# Altium PCB MainBoard.PcbDoc (part 1 of 2)
Units mil, origin at the board's own origin, x right, y up, seen from the top; angles counter-clockwise.
Board outline 6299.21 x 9187 mil, 4 copper layers (Component Side, Ground Plane, Power Plane, Solder Side), stack 33.234 mil thick; 72 components, 164 nets, 727 pads, 131 vias.
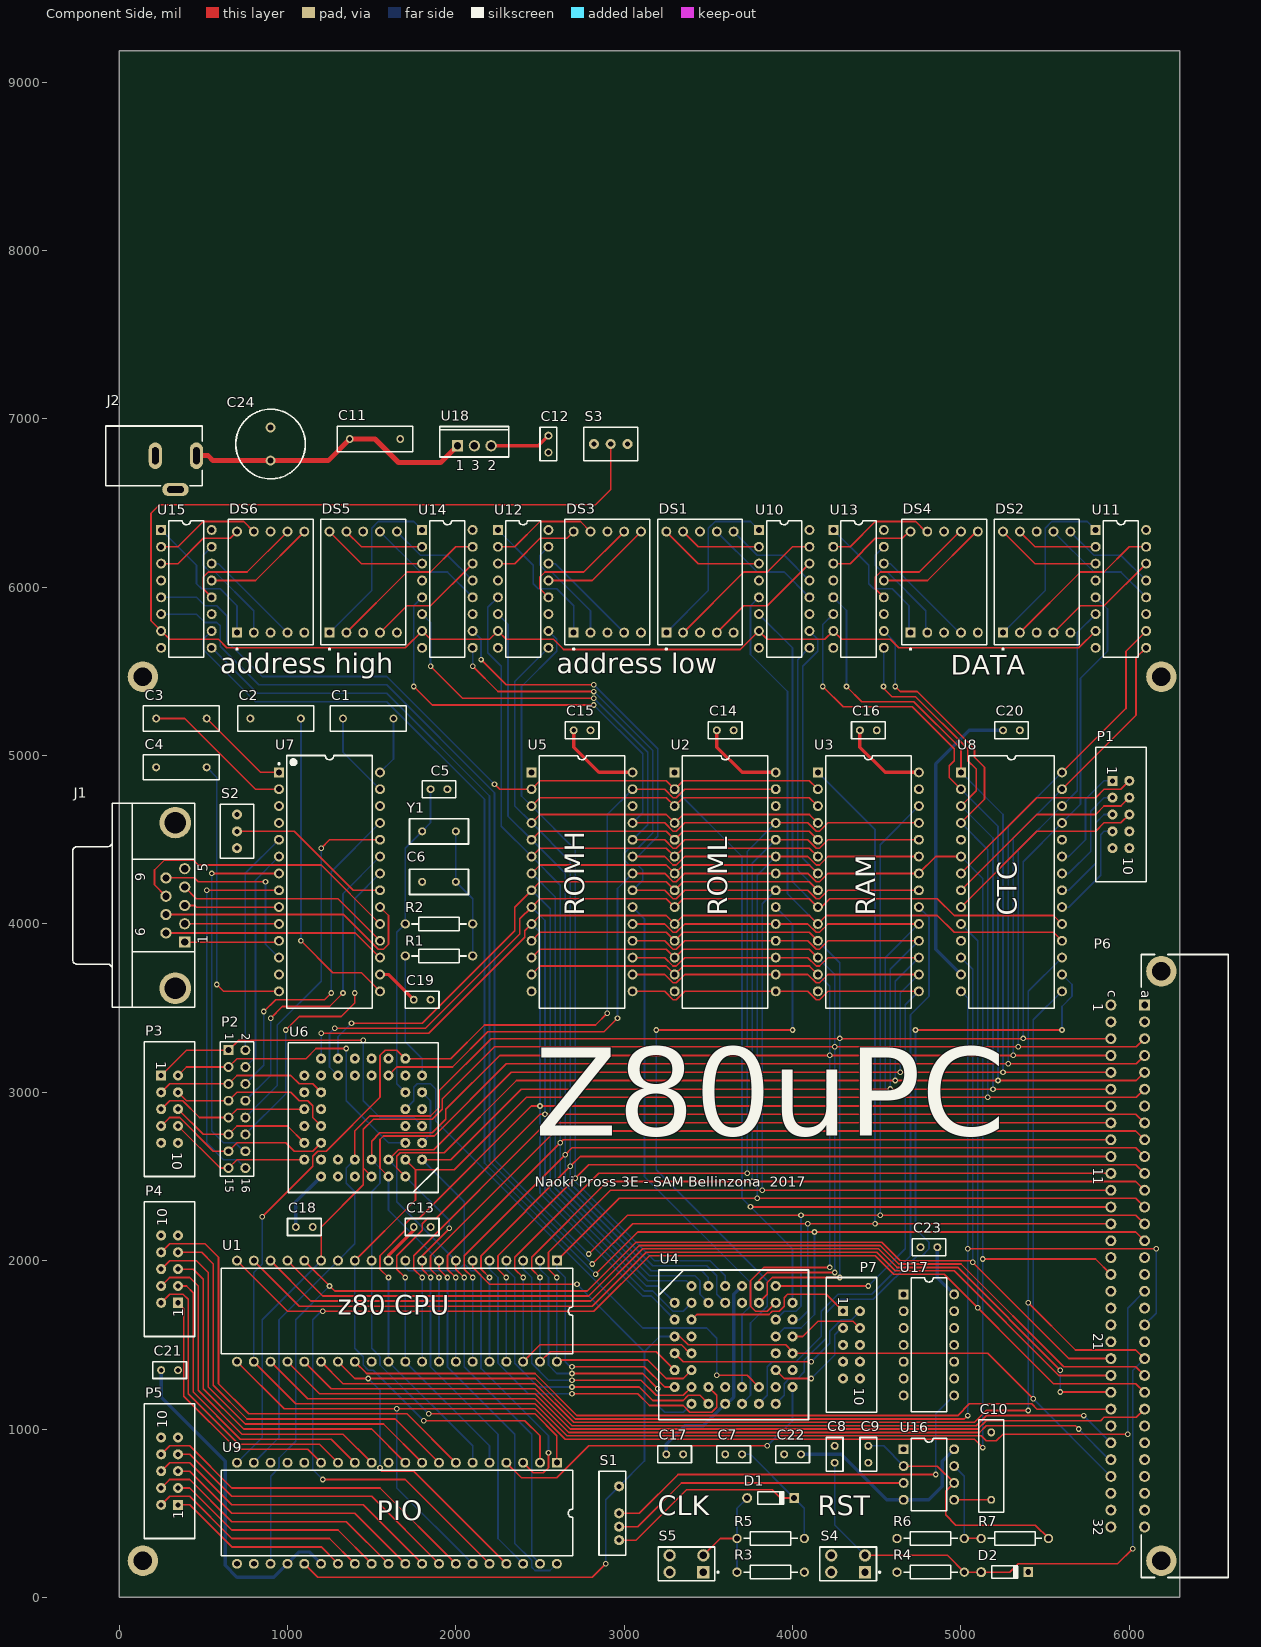
[diagram p0: Component Side view]
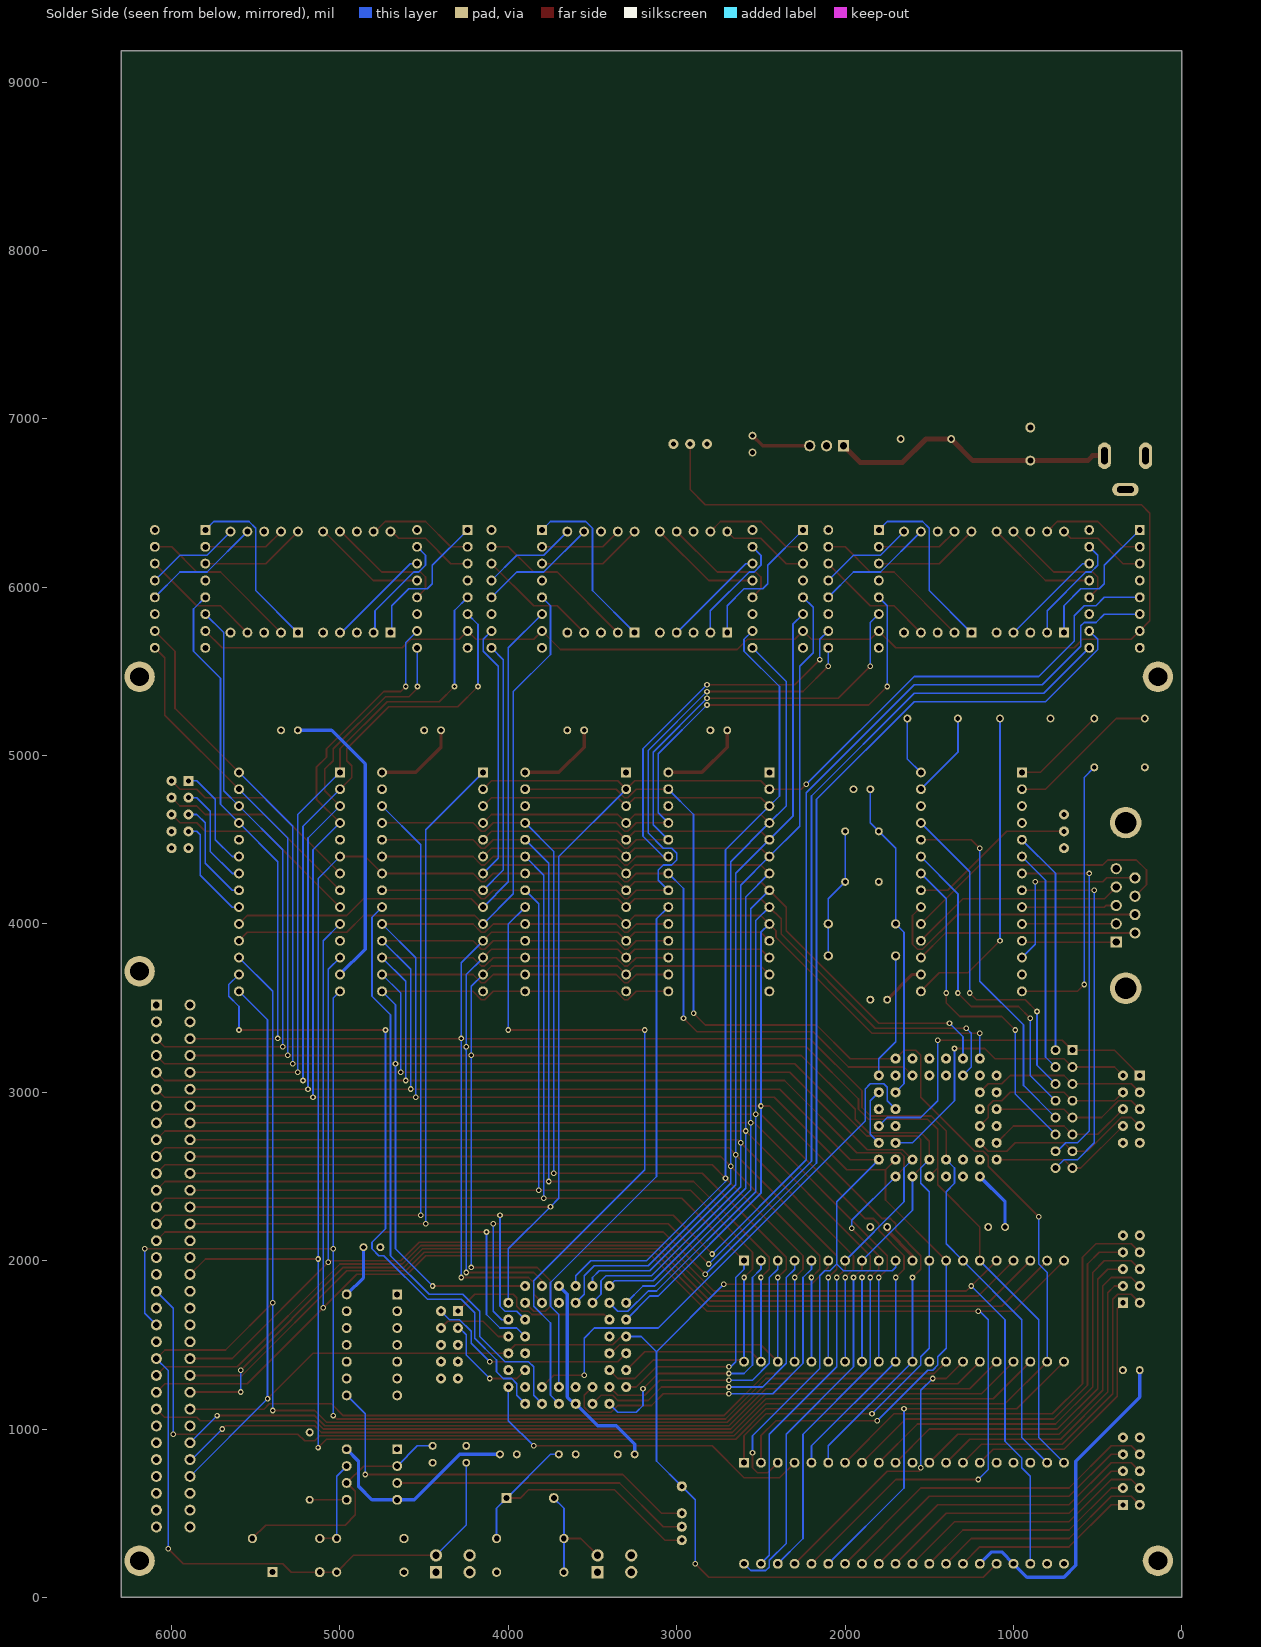
[diagram p1: Solder Side view, seen from below]
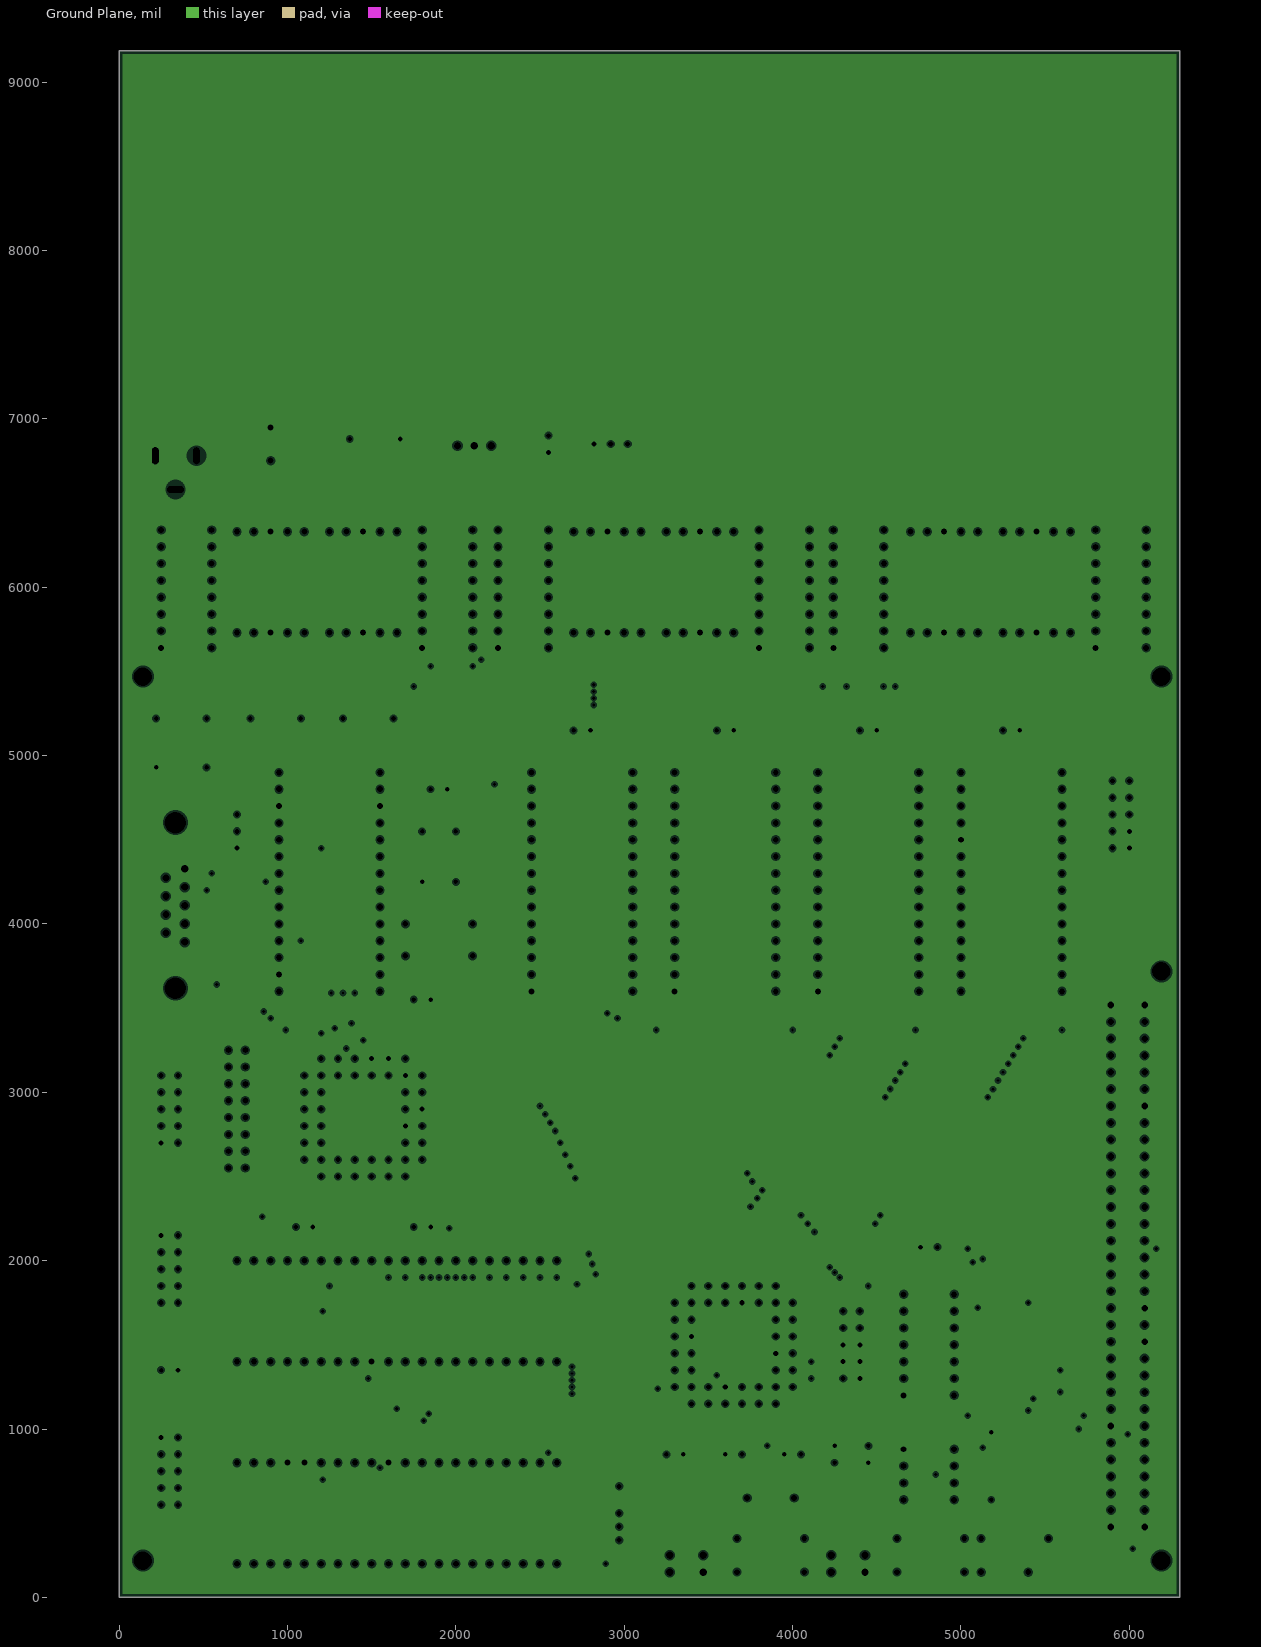
[diagram p2: Ground Plane, clearances drawn from the general rule]
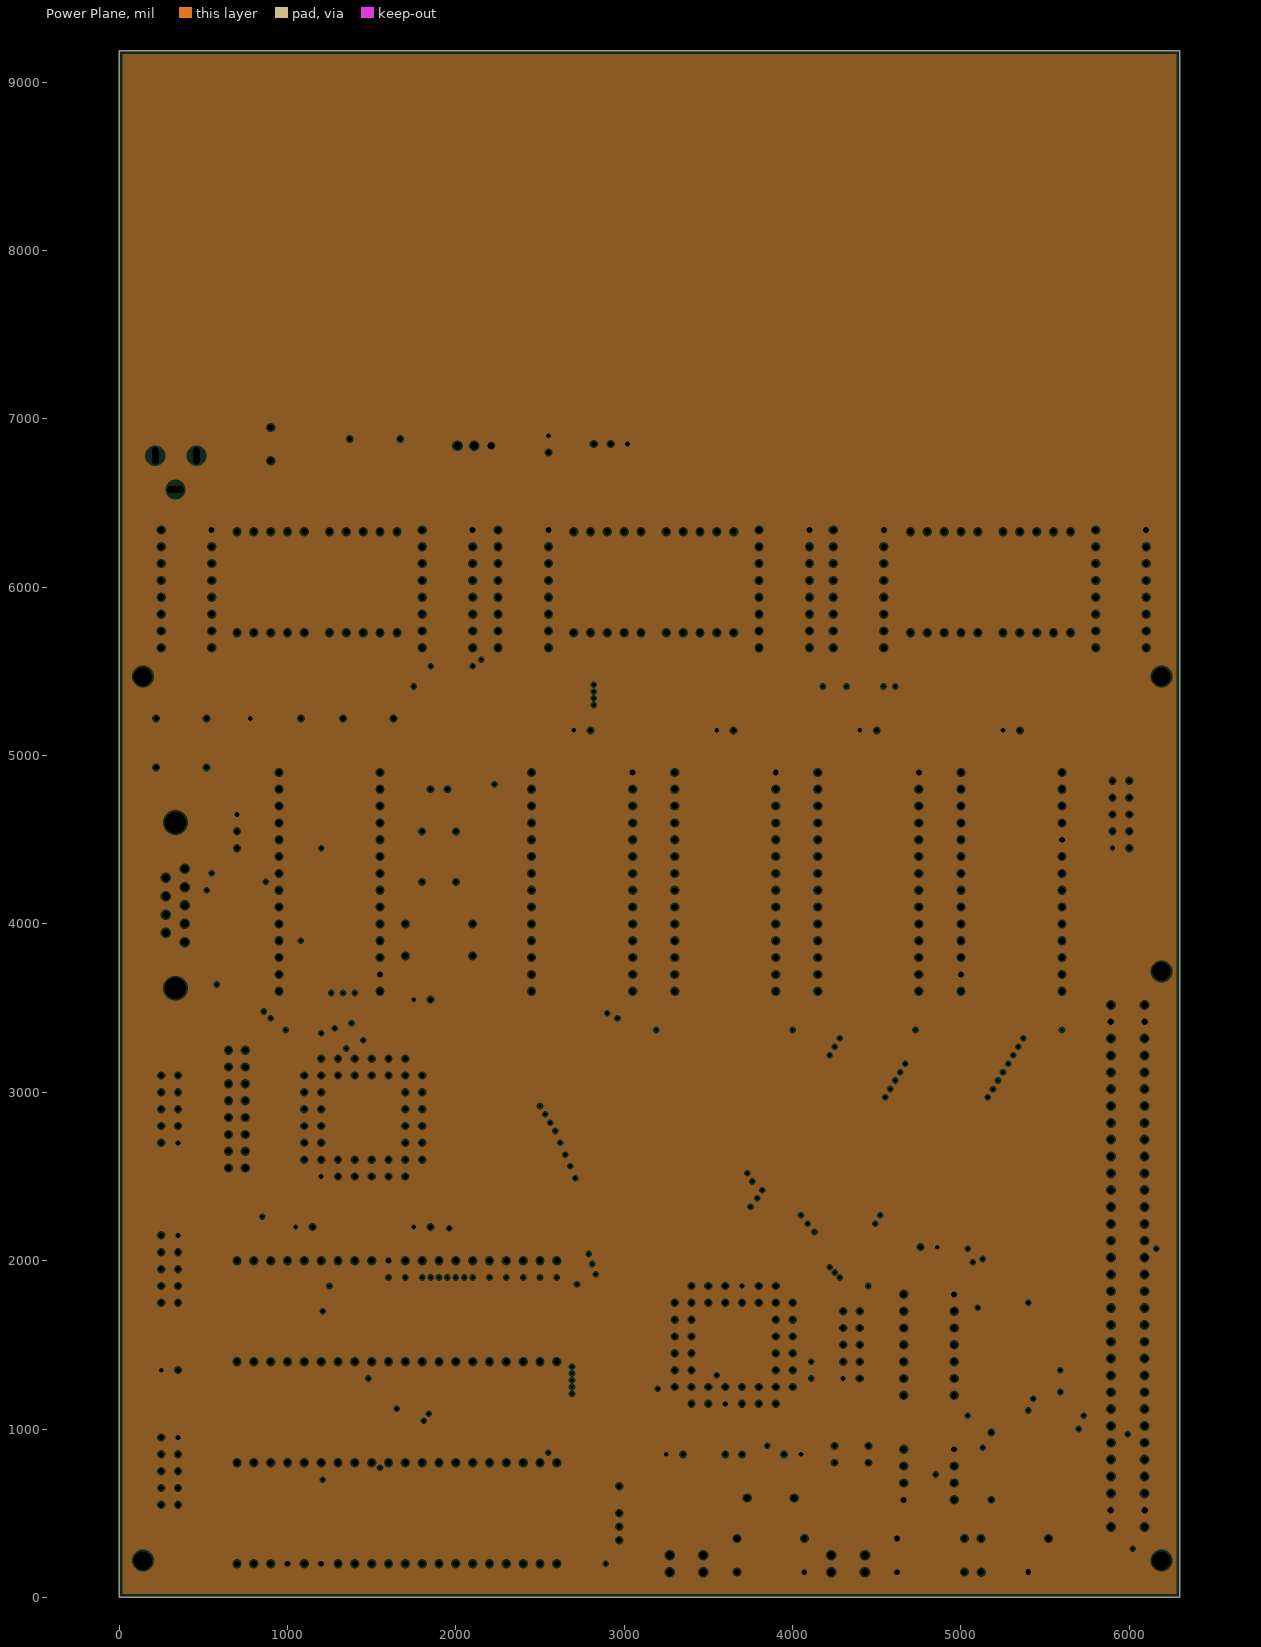
[diagram p3: Power Plane, clearances drawn from the general rule]

## Layer stack, top to bottom
Top Solder: solder mask 0.4, Solder Resist, Dk 3.5
Component Side: signal copper 1.4
Dielectric 1: core 12.6, FR-4, Dk 4.8
Ground Plane: plane copper 1.4169, net DB9-5
Dielectric 3: prepreg 5, Dk 4.2
Power Plane: plane copper 1.4169, net VCC
Dielectric 4: core 10, Dk 4.2
Solder Side: signal copper 1.4
Bottom Solder: solder mask 0.4, Solder Resist, Dk 3.5

## Board outline
0,0 0,9187 6299.21,9187 6299.21,0

## Design rules (kind name [scope] priority, off if disabled: settings)
BoardOutlineClearance [All] p1: gap=9.84 except(0: Arc-SplitContinuation Track-SplitContinuation SMDPad-SplitContinuation THPad-SplitContinuation Via-SplitContinuation Fill-SplitContinuation Poly-SplitContinuation Region-SplitContinuation Text-SplitContinuation)
Clearance Clearance-xPP-xTP-xTT [All] p1: gap=5.91
ComponentClearance [All] p1: gap=9.84 collisioncheckmode=3 verticalgap=9.84 showdistances=FALSE
DiffPairsRouting [All] p1: maxlimit=9.84 minlimit=9.84 mostfreqgap=9.84 toplayer_minwidth=15 toplayer_maxwidth=15 toplayer_prefwidth=15 bottomlayer_minwidth=15 bottomlayer_maxwidth=15 bottomlayer_prefwidth=15 maxuncoupledlength=492.13
Height [All] p1: minheight=0 maxheight=984.25 prefheight=492.13
HoleSize HoleSize-PTH [All] p1: absolutevalues=TRUE maxlimit=78.74 minlimit=9.84 maxpercent=80.000 minpercent=20.000
HoleToHoleClearance [All] p1: gap=13.78 allowstackedmicrovias=TRUE
MinimumAnnularRing "Minimum IAR  >0.45mm" [((ObjectKind = 'Pad') OR (ObjectKind = 'Via')) And (Layer = 'MultiLayer') And (HoleDiameter > AsMM(0.45))] p1: minimumring=6.89 // minimum inner annular ring for pads > 0.45mm finished hole size
MinimumAnnularRing "Minimum IAR <=0.45mm" [((ObjectKind = 'Pad') OR (ObjectKind = 'Via')) And (Layer = 'MultiLayer') And (HoleDiameter <= AsMM(0.45))] p2: minimumring=6.89 // minimum inner annular ring for pads <= 0.45mm finished hole size
MinimumSolderMaskSliver [All] p1: minsoldermaskwidth=3.15
PlaneClearance PlaneClearance-IPI [All] p1: clearance=9.84
PlaneConnect DecoupledVCCs [(ObjectKind = 'Pad') and (Name Like '*DEC*')] p1: planeconnectstyle=NoConnect reliefexpansion=20 reliefentries=4 reliefconductorwidth=10 reliefairgap=10
PlaneConnect [All] p2: planeconnectstyle=Relief reliefexpansion=6.89 reliefentries=4 reliefconductorwidth=7.87 reliefairgap=7.87
PolygonConnect PolygonConnect-xTW [All] p1: connectstyle=Relief reliefconductorwidth=7.87 reliefentries=4 polygonreliefangle="90 Angle" airgapwidth=7.87
RoutingCorners [All] p1: cornerstyle=45-Degree minsetback=98.43 maxsetback=98.43
RoutingVias "RoutingVias > 0.45mm" [(ObjectKind = 'Via') And (HoleDiameter > AsMM(0.45))] p1: holewidth=19.68 width=33.46 viastyle="Through Hole" minholewidth=19.68 minwidth=33.46 maxholewidth=35.43 maxwidth=49.21 // finishet hole size > 0.45mm
RoutingVias "RoutingVias <= 0.45mm" [(ObjectKind = 'Via') And (HoleDiameter <= AsMM(0.45))] p2: holewidth=11.81 width=25.59 viastyle="Through Hole" minholewidth=9.84 minwidth=23.62 maxholewidth=17.72 maxwidth=31.5 // finishet hole size <= 0.45mm
SilkToSilkClearance [All] p1: silktosilkclearance=7.87
SilkToSolderMaskClearance SilkscreenOverComponentPads [IsPad] p1: minsilkscreentomaskgap=7.87 clearancetoexposedcopper=TRUE
SolderMaskExpansion [All] p1: expansion=0
Width Width-xTW [All] p1: maxlimit=60 minlimit=6 preferedwidth=10
19 further rules are at their usual default settings.

## Classes and differential pairs
component class Peripherals: C7 C8 C9 C10 C11 C12 C13 C14 C15 C16 C17 C18 C19 C20 C21 C22 C23 C24 D1 D2 J2 P6 P7 R3 R4 R5 R6 R7 S4 S5 U16 U17 U18
component class MainSheet: S1 U1 U2 U3 U4 U5
component class IODevices: C1 C2 C3 C4 C5 C6 J1 P1 P2 P3 P4 P5 R1 R2 S2 U6 U7 U8 U9 Y1
component class BusViewer: DS1 DS2 DS3 DS4 DS5 DS6 S3 U10 U11 U12 U13 U14 U15

## Components (designator, comment, footprint, x,y, rotation, side; value= is the part's Value field where it differs from the comment)
C1 "Cap" RAD-0.3 1480,5220 r180 top locked
C2 "Cap" RAD-0.3 930,5220 r180 top locked
C3 "Cap" RAD-0.3 370,5220 r0 top locked
C4 "Cap" RAD-0.3 370,4930 r180 top locked
C5 "Cap" RAD-0.1 1900,4800 r0 top locked
C6 "Cap" RAD-0.2 1900,4250 r180 top locked
C7 "Cap" RAD-0.1 3650,850 r0 top locked
C8 "Cap" RAD-0.1 4250,850 r270 top locked
C9 "Cap" RAD-0.1 4450,850 r90 top locked
C10 "Cap" RAD-0.4 5180,780 r270 top locked
C11 "Cap" RAD-0.3 1520,6880 r180 top
C12 "Cap" RAD-0.1 2550,6850 r90 top
C13 "Cap" RAD-0.1 1800,2200 r180 top locked
C14 "Cap" RAD-0.1 3600,5150 r180 top locked
C15 "Cap" RAD-0.1 2750,5150 r180 top locked
C16 "Cap" RAD-0.1 4450,5150 r180 top locked
C17 "Cap" RAD-0.1 3300,850 r180 top locked
C18 "Cap" RAD-0.1 1100,2200 r180 top locked
C19 "Cap" RAD-0.1 1800,3550 r180 top locked
C20 "Cap" RAD-0.1 5300,5150 r180 top locked
C21 "Cap" RAD-0.1 300,1350 r180 top
C22 "Cap" RAD-0.1 4000,850 r0 top locked
C23 "Cap" RAD-0.1 4810,2080 r0 top locked
C24 "Cap Pol1" RB5-10.5 900,6850 r90 top
D1 "1N4148" DO-35 3870,590 r0 top locked
D2 "1N4148" DO-35 5260,150 r0 top locked
DS1 "Dpy Blue-CC" H 3450,6030 r0 top
DS2 "Dpy Blue-CC" H 5450,6030 r0 top locked
DS3 "Dpy Blue-CC" H 2900,6030 r0 top
DS4 "Dpy Blue-CC" H 4900,6030 r0 top locked
DS5 "Dpy Blue-CC" H 1450,6030 r0 top
DS6 "Dpy Blue-CC" H 900,6030 r0 top
J1 "D Connector 9" DSUB1.385-2H9 -40,4110 r90 top locked
J2 "PWR2.5" KLD-0202 -80,6780 r0 top
P1 "MHDR1X10" HDR5x2_SOCK 5900,4850 r270 top locked
P2 "Header 8X2" HDR2X8 650,3250 r270 top locked
P3 "Header 10" HDR5x2_SOCK 250,3100 r270 top locked
P4 "MHDR1X10" HDR5x2_SOCK 350,1750 r90 top
P5 "MHDR1X10" HDR5x2_SOCK 350,550 r90 top
P6 "Header 32X2" 0973264X804 6299.21,1968.5 r270 top locked
P7 "MHDR1X10" HDR5x2_SOCK 4300,1700 r270 top locked
R1 "Res2" AXIAL-0.4 1900,3810 r180 top locked
R2 "Res2" AXIAL-0.4 1900,4000 r180 top locked
R3 "Res2" AXIAL-0.4 3870,150 r0 top locked
R4 "Res2" AXIAL-0.4 4820,150 r180 top locked
R5 "Res2" AXIAL-0.4 3870,350 r0 top locked
R6 "Res2" AXIAL-0.4 4820,350 r180 top locked
R7 "Res2" AXIAL-0.4 5320,350 r180 top locked
S1 "SW-3WAY" SW_3WAY 2930,500 r270 top locked
S2 "SW-SPDT" SW_2WAY 700,4550 r90 top locked
S3 "SW-SPDT" SW_2WAY 2920,6850 r0 top
S4 "SW-PB" DPST-4 4330,200 r180 top locked
S5 "SW-PB" DPST-4 3370,200 r180 top locked
U1 "Z84C0004PEC" PDIP40#1 1650,1700 r180 top locked
U2 "M28C64-150P1" PDIP28#1 3600,4250 r270 top locked
U3 "HM62256" PDIP28#1 4450,4250 r270 top locked
U4 "M4-32/32-15JC" PLCC44_SOCKET#1 3650,1500 r0 top locked
U5 "M28C64-150P1" PDIP28#1 2750,4250 r270 top locked
U6 "TL16C550C" PLCC44_SOCKET#2 1450,2850 r180 top locked
U7 "MAX214" DIP28W 1250,4250 r0 top locked
U8 "Z84C3004PEC" PDIP28#2 5300,4250 r270 top locked
U9 "Z84C2004PEC" PDIP40#2 1650,500 r180 top locked
U10 "MC14495" DIP16 3950,5990 r270 top
U11 "MC14495" DIP16 5950,5990 r270 top locked
U12 "MC14495" DIP16 2400,5990 r270 top
U13 "MC14495" DIP16 4391.76,5990 r270 top locked
U14 "MC14495" DIP16 1950,5990 r270 top
U15 "MC14495" DIP16 400,5990 r270 top
U16 "SE555P" P008 4810,730 r270 top locked
U17 "SG51P" DIP14 4810,1500 r270 top locked
U18 "L7805ACV" TO220ABN 2110,6840 r0 top
Y1 "XTAL" RAD-0.2 1900,4550 r0 top locked

## Footprints (in the part's own frame and the unit in brackets; to place one, negate y for a bottom-side part, rotate by r counter-clockwise, add the part's x,y. Pads: shape width x height; smd on the part's side, far side on the other; paste and mask are expansions set on the pad)
0973264X804 [mm] "Connector; DIN 41612, Type R, Thru-Hole; Rows a+c, 64 Position; Right Angle"
  round 4.6 hole 2.8: 33(-44.45,-2.76) 34(44.45,-2.76)
  rect 1.65x1.65 hole 1: A1(-39.37,-5.3)
  round 1.65 hole 1: A2(-36.83,-5.3) A3(-34.29,-5.3) A4(-31.75,-5.3) A5(-29.21,-5.3) A6(-26.67,-5.3) A7(-24.13,-5.3) A8(-21.59,-5.3) A9(-19.05,-5.3) A10(-16.51,-5.3) A11(-13.97,-5.3) A12(-11.43,-5.3) A13(-8.89,-5.3) A14(-6.35,-5.3) A15(-3.81,-5.3) A16(-1.27,-5.3) A17(1.27,-5.3) A18(3.81,-5.3) A19(6.35,-5.3) A20(8.89,-5.3) A21(11.43,-5.3) A22(13.97,-5.3) A23(16.51,-5.3) A24(19.05,-5.3) A25(21.59,-5.3) A26(24.13,-5.3) A27(26.67,-5.3) A28(29.21,-5.3) A29(31.75,-5.3) A30(34.29,-5.3) A31(36.83,-5.3) A32(39.37,-5.3) C1(-39.37,-10.38) C2(-36.83,-10.38) C3(-34.29,-10.38) C4(-31.75,-10.38) C5(-29.21,-10.38) C6(-26.67,-10.38) C7(-24.13,-10.38) C8(-21.59,-10.38) C9(-19.05,-10.38) C10(-16.51,-10.38) C11(-13.97,-10.38) C12(-11.43,-10.38) C13(-8.89,-10.38) C14(-6.35,-10.38) C15(-3.81,-10.38) C16(-1.27,-10.38) C17(1.27,-10.38) C18(3.81,-10.38) C19(6.35,-10.38) C20(8.89,-10.38) C21(11.43,-10.38) C22(13.97,-10.38) C23(16.51,-10.38) C24(19.05,-10.38) C25(21.59,-10.38) C26(24.13,-10.38) C27(26.67,-10.38) C28(29.21,-10.38) C29(31.75,-10.38) C30(34.29,-10.38) C31(36.83,-10.38) C32(39.37,-10.38)
  silkscreen extent -47,-5.8 47,7.34
AXIAL-0.4 [mm]
  round 1.4 hole 0.85: 1(-5.08,0) 2(5.08,0)
  silkscreen extent -4.06,-1.02 4.06,1.02
DIP14 [mm] "DIP; 14 Leads; Row Spacing 7.62 mm; Pitch 2.54 mm"
  rect 1.5x1.5 hole 0.9: 1(-7.62,-3.81)
  round 1.5 hole 0.9: 2(-5.08,-3.81) 3(-2.54,-3.81) 4(0,-3.81) 5(2.54,-3.81) 6(5.08,-3.81) 7(7.62,-3.81) 8(7.62,3.81) 9(5.08,3.81) 10(2.54,3.81) 11(0,3.81) 12(-2.54,3.81) 13(-5.08,3.81) DEC14(-7.62,3.81)
  silkscreen extent -10.1,-2.65 10.1,2.65
DIP16 [mm] "DIP; 16 Leads; Row Spacing 7.62 mm; Pitch 2.54 mm"
  rect 1.5x1.5 hole 0.9: 1(-8.89,-3.81)
  round 1.5 hole 0.9: 2(-6.35,-3.81) 3(-3.81,-3.81) 4(-1.27,-3.81) 5(1.27,-3.81) 6(3.81,-3.81) 7(6.35,-3.81) 8(8.89,-3.81) 9(8.89,3.81) 10(6.35,3.81) 11(3.81,3.81) 12(1.27,3.81) 13(-1.27,3.81) 14(-3.81,3.81) 15(-6.35,3.81) 16(-8.89,3.81)
  silkscreen extent -10.3,-2.65 10.3,2.65
DIP28W [mm]
  rect 1.5x1.5 hole 0.9: 1(-7.62,16.51)
  round 1.5 hole 0.9: 2(-7.62,13.97) 3(-7.62,11.43) 4(-7.62,8.89) 5(-7.62,6.35) 6(-7.62,3.81) 7(-7.62,1.27) 8(-7.62,-1.27) 9(-7.62,-3.81) 10(-7.62,-6.35) 11(-7.62,-8.89) 12(-7.62,-11.43) 13(-7.62,-13.97) 14(-7.62,-16.51) 15(7.62,-16.51) 17(7.62,-11.43) 18(7.62,-8.89) 19(7.62,-6.35) 20(7.62,-3.81) 21(7.62,-1.27) 22(7.62,1.27) 23(7.62,3.81) 24(7.62,6.35) 25(7.62,8.89) 26(7.62,11.43) 27(7.62,13.97) 28(7.62,16.51) DEC16(7.62,-13.97)
  silkscreen extent -7.74,-19.05 6.45,19.05, body extent -6.68,-19.05 6.68,19.05, height 4.92
DO-35 [mm]
  round 1.5 hole 0.9: 1(-3.55,0)
  rect 1.5x1.5 hole 0.9: 2(3.55,0)
  silkscreen extent -1.95,-0.95 2.05,0.95
DPST-4 [mm]
  rect 1.85x1.85 hole 1.1: 1(-2.54,1.27)
  round 1.85 hole 1.1: 2(-2.54,-1.27) 3(2.54,-1.27) 4(2.54,1.27)
  silkscreen extent -4.88,-2.54 4.28,2.54
DSUB1.385-2H9 [mm] "Connector; D Subminiature; 9 Position; Right Angle; Pitch 1.385 mm"
  rect 1.69x1.69 hole 1.09: 1(-5.54,-10.92)
  round 1.69 hole 1.09: 2(-2.77,-10.92) 3(0,-10.92) 4(2.77,-10.92) 5(5.54,-10.92) 6(-4.155,-8.08) 7(-1.385,-8.08) 8(1.385,-8.08) 9(4.155,-8.08)
  round 4.76 hole 3.26: 10(-12.495,-9.5) 11(12.495,-9.5)
  silkscreen extent -15.4,-12.4 15.4,6
H [mm] "LED, 7-Segment Display, 14.2 mm, RHD; 10 Leads; Row Space 15.24 mm; Pitch 2.54 mm"
  rect 1.5x1.5 hole 0.9: 1(-5.08,-7.62)
  round 1.5 hole 0.9: 2(-2.54,-7.62) 3(0,-7.62) 4(2.54,-7.62) 5(5.08,-7.62) 6(5.08,7.62) 7(2.54,7.62) 8(0,7.62) 9(-2.54,7.62) 10(-5.08,7.62)
  silkscreen extent -6.4,-10.22 6.4,9.45, body extent -6.4,-9.45 6.4,9.45, height 8.25
HDR2X8 [mm] "Connector; Header; 8x2 Position"
  rect 1.5x1.5 hole 0.9: 1(0,0)
  round 1.5 hole 0.9: 2(0,2.54) 3(2.54,0) 4(2.54,2.54) 5(5.08,0) 6(5.08,2.54) 7(7.62,0) 8(7.62,2.54) 9(10.16,0) 10(10.16,2.54) 11(12.7,0) 12(12.7,2.54) 13(15.24,0) 14(15.24,2.54) 15(17.78,0) 16(17.78,2.54)
  silkscreen extent -1.27,-1.27 19.05,3.81
HDR5x2_SOCK [mil]
  rect 60x60 hole 30: 1(0,0)
  round 60 hole 30: 2(0,100) 3(100,0) 4(100,100) 5(200,0) 6(200,100) 7(300,0) 8(300,100) 9(400,0) 10(400,100)
  silkscreen extent -200,-100 600,200
KLD-0202 [mm] "DC Power Jack, 2.5mm, KLD Series, PCB Mount"
  oval 2x4 all layers, no hole: 1(13.7,0.02) 2(7.5,0.016)
  oval 1.5x3.048 hole 1 slot 2.54 at 90 deg: 1(13.7,0.02) 2(7.5,0.016)
  oval 4x2 all layers, no hole: 3(10.541,-5.08)
  oval 3.048x1.5 hole 1 slot 2.54 at 0 deg: 3(10.541,-5.08)
  silkscreen extent 0,-4.5 14.6,4.5
P008 [mm] "DIP; 8 Leads; Row Spacing 7.62 mm; Pitch 2.54 mm"
  rect 1.5x1.5 hole 0.9: 1(-3.81,-3.81)
  round 1.5 hole 0.9: 2(-1.27,-3.81) 3(1.27,-3.81) 5(3.81,3.81) 6(1.27,3.81) 7(-1.27,3.81) 8(-3.81,3.81) DEC4(3.81,-3.81)
  silkscreen extent -5.5,-2.65 5.5,2.65
PDIP28#1 [mm] "DIP; 28 Leads; Row Spacing 15.24 mm; Pitch 2.54 mm"
  rect 1.5x1.5 hole 0.9: 1(-16.51,-7.62)
  round 1.5 hole 0.9: 2(-13.97,-7.62) 3(-11.43,-7.62) 4(-8.89,-7.62) 5(-6.35,-7.62) 6(-3.81,-7.62) 7(-1.27,-7.62) 8(1.27,-7.62) 9(3.81,-7.62) 10(6.35,-7.62) 11(8.89,-7.62) 12(11.43,-7.62) 13(13.97,-7.62) 14(16.51,-7.62) 15(16.51,7.62) 16(13.97,7.62) 17(11.43,7.62) 18(8.89,7.62) 19(6.35,7.62) 20(3.81,7.62) 21(1.27,7.62) 22(-1.27,7.62) 23(-3.81,7.62) 24(-6.35,7.62) 25(-8.89,7.62) 26(-11.43,7.62) 27(-13.97,7.62) DEC28(-16.51,7.62)
  silkscreen extent -19.05,-6.45 19.05,6.45
PDIP28#2 [mm] "DIP; 28 Leads; Row Spacing 15.24 mm; Pitch 2.54 mm"
  rect 1.5x1.5 hole 0.9: 1(-16.51,-7.62)
  round 1.5 hole 0.9: 2(-13.97,-7.62) 3(-11.43,-7.62) 4(-8.89,-7.62) 5(-6.35,-7.62) 6(-3.81,-7.62) 7(-1.27,-7.62) 8(1.27,-7.62) 9(3.81,-7.62) 10(6.35,-7.62) 11(8.89,-7.62) 12(11.43,-7.62) 14(16.51,-7.62) 15(16.51,7.62) 16(13.97,7.62) 17(11.43,7.62) 18(8.89,7.62) 19(6.35,7.62) 20(3.81,7.62) 21(1.27,7.62) 22(-1.27,7.62) 23(-3.81,7.62) 24(-6.35,7.62) 25(-8.89,7.62) 26(-11.43,7.62) 27(-13.97,7.62) 28(-16.51,7.62) DEC13(13.97,-7.62)
  silkscreen extent -19.05,-6.45 19.05,6.45
PDIP40#1 [mm] "DIP; 40 Leads; Row Spacing 15.24 mm; Pitch 2.54 mm"
  rect 1.5x1.5 hole 0.9: 1(-24.13,-7.62)
  round 1.5 hole 0.9: 2(-21.59,-7.62) 3(-19.05,-7.62) 4(-16.51,-7.62) 5(-13.97,-7.62) 6(-11.43,-7.62) 7(-8.89,-7.62) 8(-6.35,-7.62) 9(-3.81,-7.62) 10(-1.27,-7.62) 12(3.81,-7.62) 13(6.35,-7.62) 14(8.89,-7.62) 15(11.43,-7.62) 16(13.97,-7.62) 17(16.51,-7.62) 18(19.05,-7.62) 19(21.59,-7.62) 20(24.13,-7.62) 21(24.13,7.62) 22(21.59,7.62) 23(19.05,7.62) 24(16.51,7.62) 25(13.97,7.62) 26(11.43,7.62) 27(8.89,7.62) 28(6.35,7.62) 29(3.81,7.62) 30(1.27,7.62) 31(-1.27,7.62) 32(-3.81,7.62) 33(-6.35,7.62) 34(-8.89,7.62) 35(-11.43,7.62) 36(-13.97,7.62) 37(-16.51,7.62) 38(-19.05,7.62) 39(-21.59,7.62) 40(-24.13,7.62) DEC11(1.27,-7.62)
  silkscreen extent -26.5,-6.45 26.5,6.45
PDIP40#2 [mm] "DIP; 40 Leads; Row Spacing 15.24 mm; Pitch 2.54 mm"
  rect 1.5x1.5 hole 0.9: 1(-24.13,-7.62)
  round 1.5 hole 0.9: 2(-21.59,-7.62) 3(-19.05,-7.62) 4(-16.51,-7.62) 5(-13.97,-7.62) 6(-11.43,-7.62) 7(-8.89,-7.62) 8(-6.35,-7.62) 9(-3.81,-7.62) 10(-1.27,-7.62) 11(1.27,-7.62) 12(3.81,-7.62) 13(6.35,-7.62) 14(8.89,-7.62) 15(11.43,-7.62) 16(13.97,-7.62) 17(16.51,-7.62) 18(19.05,-7.62) 19(21.59,-7.62) 20(24.13,-7.62) 21(24.13,7.62) 22(21.59,7.62) 23(19.05,7.62) 25(13.97,7.62) 27(8.89,7.62) 28(6.35,7.62) 29(3.81,7.62) 30(1.27,7.62) 31(-1.27,7.62) 32(-3.81,7.62) 33(-6.35,7.62) 34(-8.89,7.62) 35(-11.43,7.62) 36(-13.97,7.62) 37(-16.51,7.62) 38(-19.05,7.62) 39(-21.59,7.62) 40(-24.13,7.62) DEC24(16.51,7.62) DEC26(11.43,7.62)
  silkscreen extent -26.5,-6.45 26.5,6.45
PLCC44_SOCKET#1 [mil] "Socket for PLCC44"
  round 60 hole 30: 1(50,250) 2(-50,350) 3(-50,250) 4(-150,350) 5(-150,250) 6(-250,350) 7(-350,250) 8(-250,250) 9(-350,150) 10(-250,150) 11(-350,50) 12(-250,50) 13(-350,-50) 14(-250,-50) 15(-350,-150) 16(-250,-150) 17(-350,-250) 18(-250,-350) 19(-250,-250) 20(-150,-350) 21(-150,-250) 23(-50,-250) 24(50,-350) 25(50,-250) 26(150,-350) 27(150,-250) 28(250,-350) 29(350,-250) 30(250,-250) 31(350,-150) 32(250,-150) 33(350,-50) 34(250,-50) 35(350,50) 36(250,50) 37(350,150) 38(250,150) 39(350,250) 40(250,350) 41(250,250) 42(150,350) 43(150,250) DEC22(-50,-350) DEC44(50,350)
  silkscreen extent -445,-445 445,445
PLCC44_SOCKET#2 [mil] "Socket for PLCC44"
  round 60 hole 30: 1(50,250) 2(-50,350) 3(-50,250) 4(-150,350) 5(-150,250) 6(-250,350) 7(-350,250) 8(-250,250) 9(-350,150) 10(-250,150) 11(-350,50) 12(-250,50) 13(-350,-50) 14(-250,-50) 15(-350,-150) 16(-250,-150) 17(-350,-250) 18(-250,-350) 19(-250,-250) 20(-150,-350) 21(-150,-250) 22(-50,-350) 23(-50,-250) 24(50,-350) 25(50,-250) 26(150,-350) 27(150,-250) 28(250,-350) 29(350,-250) 30(250,-250) 31(350,-150) 32(250,-150) 33(350,-50) 34(250,-50) 35(350,50) 36(250,50) 37(350,150) 38(250,150) 39(350,250) 41(250,250) 42(150,350) 43(150,250) 44(50,350) DEC40(250,350)
  silkscreen extent -445,-445 445,445
RAD-0.1 [mm]
  round 1.2 hole 0.7: 1(-1.27,0) 2(1.27,0)
  silkscreen extent -2.54,-1.27 2.54,1.27
RAD-0.2 [mm]
  round 1.2 hole 0.7: 1(-2.54,0) 2(2.54,0)
  silkscreen extent -4.44,-1.91 4.44,1.91
RAD-0.3 [mm] "Radial Cap, Thru-Hole; 2 Leads; 0.3 in Pin Spacing"
  round 1.2 hole 0.7: 1(-3.81,0) 2(3.81,0)
  silkscreen extent -5.71,-1.91 5.71,1.91
RAD-0.4 [mm] "Radial Cap, Thru-Hole; 2 Leads; 0.4 in Pin Spacing"
  round 1.2 hole 0.7: 1(-5.08,0) 2(5.08,0)
  silkscreen extent -6.98,-1.91 6.98,1.91
RB5-10.5 [mm] "Capacitor (Radial); 2 Leads"
  round 1.5 hole 0.9: 1(-2.5,0) 2(2.5,0)
  silkscreen extent -5.25,-5.25 5.25,5.25
SW_2WAY [mil]
  round 60 hole 30: 1(-100,0) 2(0,0) 3(100,0)
  silkscreen extent -160,-100 160,100
SW_3WAY [mil]
  round 60 hole 30: 1(-160,40) 3(0,40) 4(80,40) 5(160,40)
  silkscreen extent -250,-80 250,80
TO220ABN [mm] "TO, Thru-Hole, Vertical, Heatsink Mounted; 3 In-Line Leads; Pitch 2.54 mm; Pin sequence 1, 3, 2"
  rect 1.7x1.7 hole 1.1: 1(-2.54,0)
  round 1.7 hole 1.1: 3(0,0) DEC2(2.54,0)
  silkscreen extent -5.2,-1.7 5.2,2.9

## Part data
C1 C2 C3 C4 C5 C6 C7 C8 C9 C10 C11 C12 C13 C14 C15 C16 C17 C18 C19 C20 C21 C22 C23: "Capacitor"
C24: "Polarized Capacitor (Radial)"
D1 D2: library part "Diode 1N4148", "High Conductance Fast Diode"
DS1 DS2 DS3 DS4 DS5 DS6: "14.2 mm General Purpose Blue 7-Segment Display: CC, RH DP, Gray Surface"
J1: "Receptacle Assembly, 9 Position, Right Angle"
J2: "Low Voltage Power Supply Connector"
P1 P3 P4 P5 P7: "Header, 10-Pin"
P2: "Header, 8-Pin, Dual row"
P6: "Header, 32-Pin, Dual row"
R1 R2 R3 R4 R5 R6 R7: "Resistor"
S1: "SGA-13P-03V-7295"
S2 S3: "SPDT Subminiature Toggle Switch, Right Angle Mounting, Vertical Actuation"
S4 S5: "Switch"
U1: "CMOS 8-Bit Microprocessor"
U2 U5: "Parallel 64 Kbit (8K x 8) EEPROM with Software Data Protection"
U3: "8K x 8 Static RAM"
U4: "High-Performance EE CMOS In-System Programmable Logic"
U8: "CMOS Four-Channel Counter/Timer Circuit"
U9: "CMOS Parallel I/O Controller"
U10 U11 U12 U13 U14 U15: "Hexadecimal to seven segment Latch / Decoder LED Driver"
U16: "Precision Timer"
U17: "4.000000  MHz High Frequency Oscillator"
U18: "Precision 1A Regulator"
Y1: "Crystal Oscillator"

## Free pads (board coordinates)
  round 181.1 hole 110.24: BL(141.73,218.5) TL(141.73,5468.5) TR(6190.55,5468.5)

## Via types
v1: diameter 33.46, hole 19.68, Component Side to Solder Side, 131 vias

## Nets (pads, with @x,y where several pads share a name; then routed paths per layer and width w, separated by ;. In a path a pad name is that pad's centre, name@x,y a point inside that pad or via, vN(x,y) a via of type N, cw(c..) or ccw(c..) an arc to the next point about the centre after c; other vN are vias at no path point)
A0: P6.C7 U1.30 U2.10 U3.10 U4.9 U5.10 U6.28 U8.18 U9.6 U10.5 | length 16056
  Component Side w10: v1(1200,3350) 1840,3350 2410,3920 2410,3960 U5.10@2450,4000 2500,4050 3250,4050 U2.10@3300,4000 3350,4050 4100,4050 U3.10@4150,4000 4200,4050 4860,4050 4960,3950 5550,3950 U8.18@5600,3900 ; v1(1600,1900) 1550,1950 1550,2030 1700,2180 1700,2220 1730,2250 1780,2250 2448.5,2918.5 v1(2500,2918.5) P6.C7@5890.55,2918.5
  Solder Side w10: U6.28@1200,3200 v1(1200,3350) ; v1(1600,1900) U1.30@1600,1400 2100,900 U9.6@2100,800 ; U5.10@2450,4000 2500,3950 v1(2500,2918.5) 2500,2400 3110,1790 3160,1790 U4.9@3300,1650 ; U10.5@3800,5940 3750,5890 3750,5600 3970,5380 3970,4180 U3.10@4150,4000
A1: P6.A8 U1.31 U2.9 U3.9 U4.8 U5.9 U6.27 U8.19 U9.5 U10.6 | length 16229.6
  Component Side w10: v1(1280,3380) 1820,3380 2380,3940 2380,4030 U5.9@2450,4100 2500,4150 3250,4150 U2.9@3300,4100 3350,4150 4100,4150 U3.9@4150,4100 4170,4100 4220,4150 4860,4150 4960,4050 5550,4050 U8.19@5600,4000 ; v1(1700,1900) 1650,1950 1650,2030 1800,2180 1800,2220 1830,2250 1880,2250 2500,2870 v1(2530,2870) 6039.06,2870 P6.A8@6090.55,2818.5
  Solder Side w10: v1@1280,3370 1270,3370 1250,3350 1250,3150 U6.27@1300,3100 ; v1(1700,1900) U1.31@1700,1400 2200,900 U9.5@2200,800 ; U5.9@2450,4100 2530,4020 v1(2530,2870) 2530,2410 3120,1820 3170,1820 3290,1700 3350,1700 U4.8@3400,1750 ; U10.6@3800,5840 4000,5640 4000,4250 U3.9@4150,4100
A2: P6.C8 U1.32 U2.8 U3.8 U4.7 U5.8 U6.26 U10.9 | length 12984.9
  Component Side w10: v1(1380,3410) 1800,3410 2350,3960 2350,4100 U5.8@2450,4200 2500,4250 3250,4250 U2.8@3300,4200 3350,4250 4100,4250 U3.8@4150,4200 ; v1(1800,1900) 1750,1950 1750,2030 2538.5,2818.5 P6.C8@5890.55,2818.5
  Solder Side w10: U6.26@1300,3200 1300,3330 v1(1380,3410) ; U1.32@1800,1400 v1(1800,1900) ; U5.8@2450,4200 2560,4090 v1(2560,2820) 2560,2420 3130,1850 3200,1850 U4.7@3300,1750 ; U10.9@4100,5640 4030,5570 4030,4320 U3.8@4150,4200
A3: P6.A9 U1.33 U2.7 U3.7 U4.6 U5.7 U10.10 | length 11515.5
  Component Side w10: v1(1900,1900) 1850,1950 1850,2030 v1(2590,2770) 6039.06,2770 P6.A9@6090.55,2718.5 ; U5.7@2450,4300 2500,4350 3250,4350 U2.7@3300,4300 3350,4350 4100,4350 U3.7@4150,4300
  Solder Side w10: U1.33@1900,1400 v1(1900,1900) ; U5.7@2450,4300 2590,4160 v1(2590,2770) 2590,2430 3140,1880 3370,1880 U4.6@3400,1850 ; U10.10@4100,5740 4150,5690 4150,5620 4060,5530 4060,4390 U3.7@4150,4300
A4: P6.C9 U1.34 U2.6 U3.6 U4.5 U5.6 U12.5 | length 11574.9
  Component Side w10: v1(2000,1900) 1950,1950 1950,2030 v1(2620,2700) 2638.5,2718.5 P6.C9@5890.55,2718.5 ; U5.6@2450,4400 2500,4450 3250,4450 U2.6@3300,4400 3350,4450 4100,4450 U3.6@4150,4400
  Solder Side w10: U1.34@2000,1400 v1(2000,1900) ; U12.5@2250,5940 2190,5880 2190,5610 2270,5530 2270,4580 U5.6@2450,4400 2620,4230 v1(2620,2700) 2620,2440 3150,1910 3420,1910 3450,1880 3450,1800 U4.5@3500,1750
A5: P6.A10 U1.35 U2.5 U3.5 U4.4 U5.5 U12.6 | length 11444
  Component Side w10: v1(2100,1900) 2050,1950 2050,2030 v1(2650,2630) 2690,2670 6039.06,2670 P6.A10@6090.55,2618.5 ; U5.5@2450,4500 2500,4550 3250,4550 U2.5@3300,4500 3350,4550 4100,4550 U3.5@4150,4500
  Solder Side w10: U1.35@2100,1400 v1(2100,1900) ; U12.6@2250,5840 2310,5780 2310,4640 U5.5@2450,4500 2650,4300 v1(2650,2630) 2650,2450 3160,1940 3460,1940 3500,1900 U4.4@3500,1850
A6: P6.C10 U1.36 U2.4 U3.4 U4.3 U5.4 U12.9 | length 11095.9
  Component Side w10: v1(2200,1900) 2150,1950 2150,2030 v1(2680,2560) 2738.5,2618.5 P6.C10@5890.55,2618.5 ; U5.4@2450,4600 2500,4650 3250,4650 U2.4@3300,4600 3350,4650 4100,4650 U3.4@4150,4600
  Solder Side w10: U1.36@2200,1400 v1(2200,1900) ; U12.9@2550,5640 2350,5440 2350,4700 U5.4@2450,4600 2680,4370 v1(2680,2560) 2680,2460 3170,1970 3490,1970 3550,1910 3550,1800 U4.3@3600,1750
A7: P6.A11 U1.37 U2.3 U3.3 U4.2 U5.3 U12.10 | length 11211.3
  Component Side w10: v1(2300,1900) 2250,1950 2250,2030 v1(2710,2490) 2790,2570 6039.06,2570 P6.A11@6090.55,2518.5 ; U5.3@2450,4700 2500,4750 3250,4750 U2.3@3300,4700 3350,4750 4100,4750 U3.3@4150,4700
  Solder Side w10: U1.37@2300,1400 v1(2300,1900) ; U12.10@2550,5740 2600,5690 2600,5620 2390,5410 2390,4760 U5.3@2450,4700 2710,4440 v1(2710,2490) 2710,2470 3180,2000 3510,2000 3600,1910 U4.2@3600,1850
A8: P6.C11 U1.38 U2.25 U3.25 U4.14 U5.25 U14.5 | length 11894.4
  Component Side w10: v1(1750,5410) 1860,5300 v1(2820,5300) ; U1.38@2400,1400 2500,1500 3340,1500 3390,1450 U4.14@3400,1450 ; v1(2400,1900) 2350,1950 2350,2020 2848.5,2518.5 P6.C11@5890.55,2518.5 ; U5.25@3050,4600 3240,4600 3290,4550 3310,4550 3360,4600 U2.25@3900,4600 4090,4600 4140,4550 4160,4550 4210,4600 U3.25@4750,4600
  Solder Side w10: v1(1750,5410) 1750,5890 U14.5@1800,5940 ; U1.38@2400,1400 v1(2400,1900) ; v1(2820,5300) 3110,5010 3110,4660 U5.25@3050,4600 ; v1(3730,2520) 3730,4430 U2.25@3900,4600
A9: P6.A12 U1.39 U2.24 U3.24 U4.15 U5.24 U14.6 | length 11619.5
  Component Side w10: v1(1850,5530) 2040,5340 v1(2820,5340) ; U1.39@2500,1400 2560,1460 3190,1460 U4.15@3300,1350 ; v1(2500,1900) 2450,1950 2450,2020 2900,2470 6039.06,2470 P6.A12@6090.55,2418.5 ; U5.24@3050,4500 3240,4500 3290,4450 3310,4450 3360,4500 U2.24@3900,4500 4090,4500 4140,4450 4160,4450 4210,4500 U3.24@4750,4500
  Solder Side w10: U14.6@1800,5840 1850,5790 v1(1850,5530) ; U1.39@2500,1400 v1(2500,1900) ; v1(2820,5340) 3140,5020 3140,4590 U5.24@3050,4500 ; v1(3760,2470) 3760,4360 U2.24@3900,4500
A10: P6.C12 U1.40 U2.21 U3.21 U4.16 U5.21 U14.9 | length 11048.3
  Component Side w10: v1(2100,5530) 2250,5380 v1(2820,5380) ; U1.40@2600,1400 2610,1410 3140,1410 3250,1300 3350,1300 U4.16@3400,1350 ; v1(2600,1900) 2550,1950 2550,2050 2918.5,2418.5 v1(3820,2418.5) P6.C12@5890.55,2418.5 ; U5.21@3050,4200 3240,4200 3290,4150 3310,4150 3360,4200 U2.21@3900,4200 4090,4200 4140,4150 4160,4150 4210,4200 U3.21@4750,4200
  Solder Side w10: v1(2100,5530) U14.9@2100,5640 ; U1.40@2600,1400 v1(2600,1900) ; v1(2820,5380) 3170,5030 3170,4540 3080,4450 3030,4450 3000,4420 3000,4380 3030,4350 3080,4350 3110,4320 3110,4260 U5.21@3050,4200 ; v1(3820,2418.5) 3820,4120 U2.21@3900,4200
A11: P6.A13 U1.1 U2.23 U3.23 U4.17 U5.23 U14.10 | length 11036.3
  Component Side w10: v1(2150,5570) 2300,5420 v1(2820,5420) ; U1.1@2600,2000 2970,2370 v1(3790,2370) 6039.06,2370 P6.A13@6090.55,2318.5 ; v1(2690,1370) 3120,1370 3240,1250 U4.17@3300,1250 ; U5.23@3050,4400 3240,4400 3290,4350 3310,4350 3360,4400 U2.23@3900,4400 4090,4400 4140,4350 4160,4350 4210,4400 U3.23@4750,4400
  Solder Side w10: U14.10@2100,5740 2150,5690 v1(2150,5570) ; U1.1@2600,2000 2600,1950 2650,1900 2650,1400 2680,1370 v1(2690,1370) ; v1(2820,5420) 3200,5040 3200,4520 3080,4400 U5.23@3050,4400 ; v1(3790,2370) 3790,4290 U2.23@3900,4400
A12: P6.C13 U2.2 U3.2 U4.39 U5.2 U15.5 | length 10017.8
  Component Side w10: v1(2230,4830) 2260,4800 U5.2@2450,4800 2500,4850 3250,4850 U2.2@3300,4800 3350,4850 4100,4850 4140,4810 U3.2@4140,4800 ; v1@3751.5,2318.5 P6.C13@5890.55,2318.5
  Solder Side w10: U15.5@250,5940 460,5940 510,5890 580,5890 640,5830 640,5680 850,5470 1590,5470 v1(2230,4830) ; U2.2@3300,4800 3700,4400 3700,2370 v1(3750,2320) 4000,2070 U4.39@4000,1750
A13: P6.A14 U3.26 U4.38 U15.6 | length 12126.9
  Component Side w10: v1(2790,2040) 3020,2270 v1(4050,2270) v1(4520,2270) 6039.06,2270 P6.A14@6090.55,2218.5
  Solder Side w10: U15.6@250,5840 460,5840 510,5790 580,5790 600,5770 600,5650 830,5420 1590,5420 2230,4780 2230,2600 v1(2790,2040) ; U4.38@3900,1650 3950,1700 4020,1700 4050,1730 v1(4050,2270) ; v1(4520,2270) 4520,4470 U3.26@4750,4700
A14: P6.C14 U3.1 U4.37 U15.9 | length 11679.3
  Component Side w10: v1(2810,1980) 3050,2220 v1(4090,2220) 4091.5,2218.5 P6.C14@5890.55,2218.5
  Solder Side w10: U15.9@550,5640 820,5370 1590,5370 2200,4760 2200,2590 v1(2810,1980) ; U4.37@4000,1650 4040,1650 4090,1700 v1(4090,2220) ; U3.1@4150,4900 4490,4560 v1(4490,2220)
A15: P6.A15 U4.36 U15.10 | length 9422
  Component Side w10: v1(2830,1920) 3080,2170 v1(4130,2170) 6039.06,2170 P6.A15@6090.55,2118.5
  Solder Side w10: U15.10@550,5740 500,5690 500,5630 810,5320 1590,5320 2170,4740 2170,2580 v1(2830,1920) ; U4.36@3900,1550 3950,1600 4050,1600 4130,1680 v1(4130,2170)
B\U\S\A\C\K\: P6.C28 U1.23 | length 5264.6
  Component Side w10: U1.23@900,1400 1120,1180 2470,1180 2670,980 5110,980 5150,1020 5680,1020 v1(5700,1000)
  Solder Side w10: v1(5700,1000) 5881.5,818.5 P6.C28@5890.55,818.5
B\U\S\R\E\Q\: P6.C27 U1.25 | length 5040.3
  Component Side w10: U1.25@1100,1400 1260,1240 2470,1240 2690,1020 5090,1020 5150,1080 v1(5730,1080)
  Solder Side w10: v1(5730,1080) 5730,1079.06 P6.C27@5890.55,918.5
C\S\C\T\C\: U4.28 U8.16 | length 4043.8
  Component Side w10: v1(4730,3370) v1(5600,3370)
  Solder Side w10: U4.28@3900,1150 3950,1200 3950,1270 3980,1300 4030,1300 4070,1340 4070,1410 4200,1540 4200,1690 4280,1770 4480,1770 4740,2030 4770,2030 4810,2070 4810,2110 4730,2190 v1(4730,3370) ; v1(5600,3370) 5600,3510 5660,3570 5660,3640 U8.16@5600,3700
C\S\P\I\O\: U4.29 U9.4 | length 2078.1
  Component Side w10: U9.4@2300,800 2390,710 2600,710 2790,900 v1(3850,900)
  Solder Side w10: v1(3850,900) 4000,1050 U4.29@4000,1250
C\S\R\A\M\: U3.20 U4.26 | length 3592.4
  Solder Side w10: U4.26@3800,1150 3850,1200 3850,1370 3880,1400 4020,1400 4170,1550 4170,1700 4270,1800 4470,1800 4700,2030 4700,3460 4810,3570 4810,4040 U3.20@4750,4100
C\S\R\O\M\H\: U4.25 U5.20 | length 3160.7
  Solder Side w10: U5.20@3050,4100 3120,4030 3120,2500 3750,1870 3750,1730 3700,1680 U4.25@3700,1250
C\S\R\O\M\L\: U2.20 U4.24 | length 4136.9
  Component Side w10: v1(3190,3370) v1(4000,3370)
  Solder Side w10: v1(3190,3370) 3190,2540 3850,1880 3850,1730 3750,1630 3750,1200 U4.24@3700,1150 ; U2.20@3900,4100 4000,4000 v1(4000,3370)
C\S\U\A\R\T\: U4.27 U6.14 | length 3194.8
  Component Side w10: v1(3550,1320) 3730,1320 U4.27@3800,1250
  Solder Side w10: U6.14@1700,2900 1750,2950 1750,3030 1770,3050 1850,3050 1880,3020 1880,2830 3110,1600 3490,1600 3550,1540 v1(3550,1320)
C\T\S\: P2.7 P3.4 U6.36 | length 1015.3
  Component Side w10: P3.4@350,3000 400,2950 P2.7@650,2950 700,3000 1020,3000 1070,2950 1120,2950 1150,2920 1150,2850 U6.36@1200,2800
CLK: P6.C29 S1.1 U1.6 U4.11 U4.33 U8.15 U9.25 | length 10127.7
  Component Side w10: U9.25@1100,200 1180,120 2810,120 v1(2890,200) ; U1.6@2100,2000 2100,1960 2200,1860 v1(2720,1860) ; U4.11@3300,1550 3330,1550 3380,1500 3960,1500 4000,1460 U4.33@4000,1450 5160,1450 v1(5430,1180)
  Solder Side w10: v1(2720,1860) 3120,1460 ; v1(2890,200) 2890,580 S1.1@2970,660 3120,810 3120,1460 ; U4.11@3300,1550 3210,1550 3120,1460 ; U8.15@5600,3600 5430,3430 5430,1179.06 P6.C29@5890.55,718.5
CLK1: C7.2 D1.2 R5.2 S1.5 | length 1867.1
  Component Side w10: S1.5@2970,340 3070,340 3370,640 3880,640 3930,590 D1.2@4009.76,590
  Solder Side w10: C7.2@3700,850 3749.76,850 D1.2@4009.76,590 4070,529.76 R5.2@4070,350
CLK2: S1.4 U16.3 | length 1797.7
  Component Side w10: S1.4@2970,420 3080,420 3340,680 U16.3@4660,680
CLK3: S1.3 U17.8 | length 2490.8
  Component Side w10: S1.3@2970,500 3090,500 3320,730 v1(4850,730)
  Solder Side w10: v1(4850,730) 4850,1090 U17.8@4960,1200
D0: P6.C3 U1.14 U2.11 U3.11 U4.43 U5.11 U6.1 U8.25 U9.19 U11.5 | length 14311.3
  Component Side w10: U6.1@1400,2600 1400,2770 1489.09,2859.09 1849.09,2859.09 1900,2910 1900,3008.5 2210,3318.5 P6.C3@5890.55,3318.5 ; U5.11@2450,3900 2500,3950 3250,3950 U2.11@3300,3900 3350,3950 4100,3950 U3.11@4150,3900 ; U4.43@3800,1750 3850,1800 3850,1870 3880,1900 v1(4280,1900)
  Solder Side w10: U9.19@800,800 950,950 950,1650 U1.14@1300,2000 1400,2100 1400,2410 1350,2460 1350,2550 U6.1@1400,2600 ; U3.11@4150,3900 4280,3770 v1(4280,3320) v1(4280,1900) ; v1(5370,3320) 5370,4370 U8.25@5600,4600 5710,4710 5710,5460 5870,5620 5870,5870 U11.5@5800,5940